# Altium PCB 51第二形态.pcbdoc
Units mil, origin at the board's own origin, x right, y up, seen from the top; angles counter-clockwise.
Board outline 3425 x 4345 mil, 2 copper layers (Top Layer, Bottom Layer); 39 components, 53 nets, 162 pads, 38 vias.
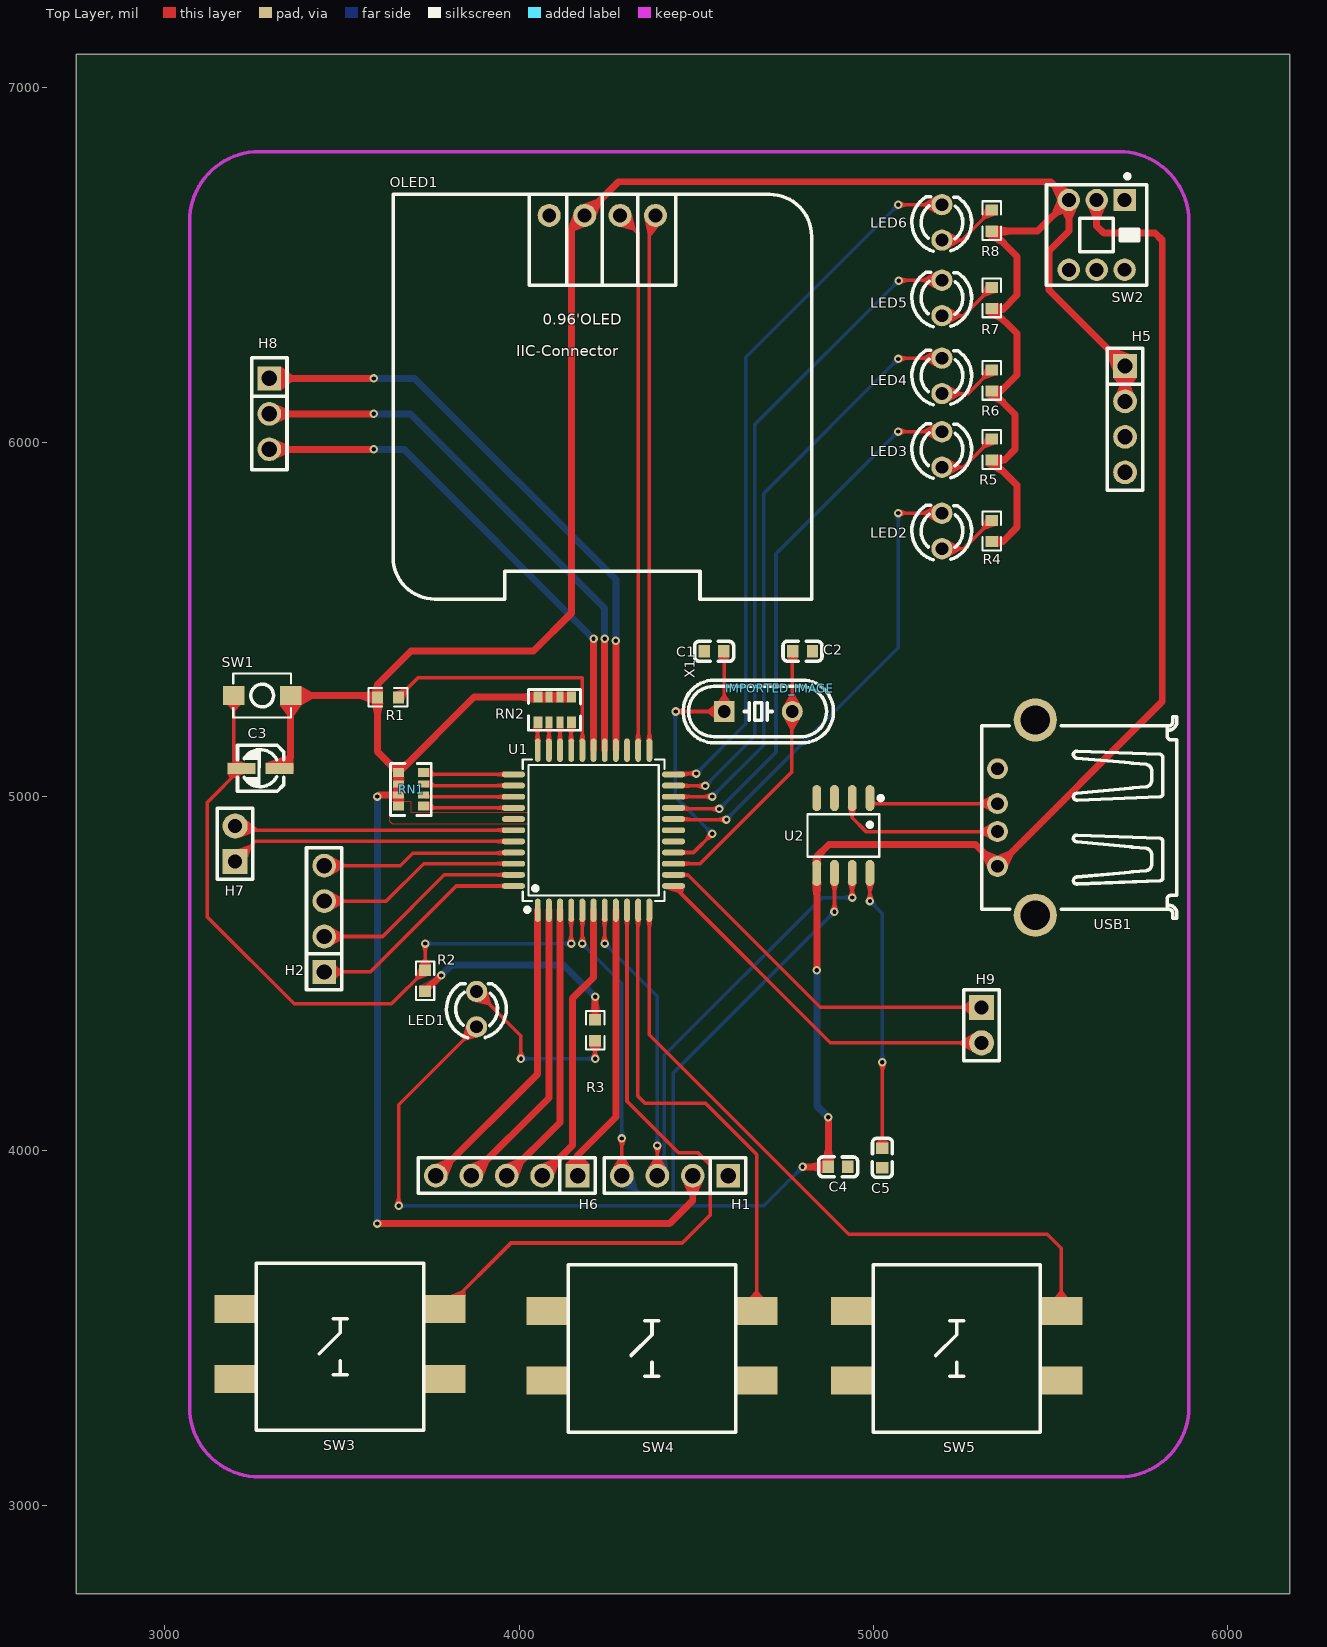
[diagram p0: Top Layer view]
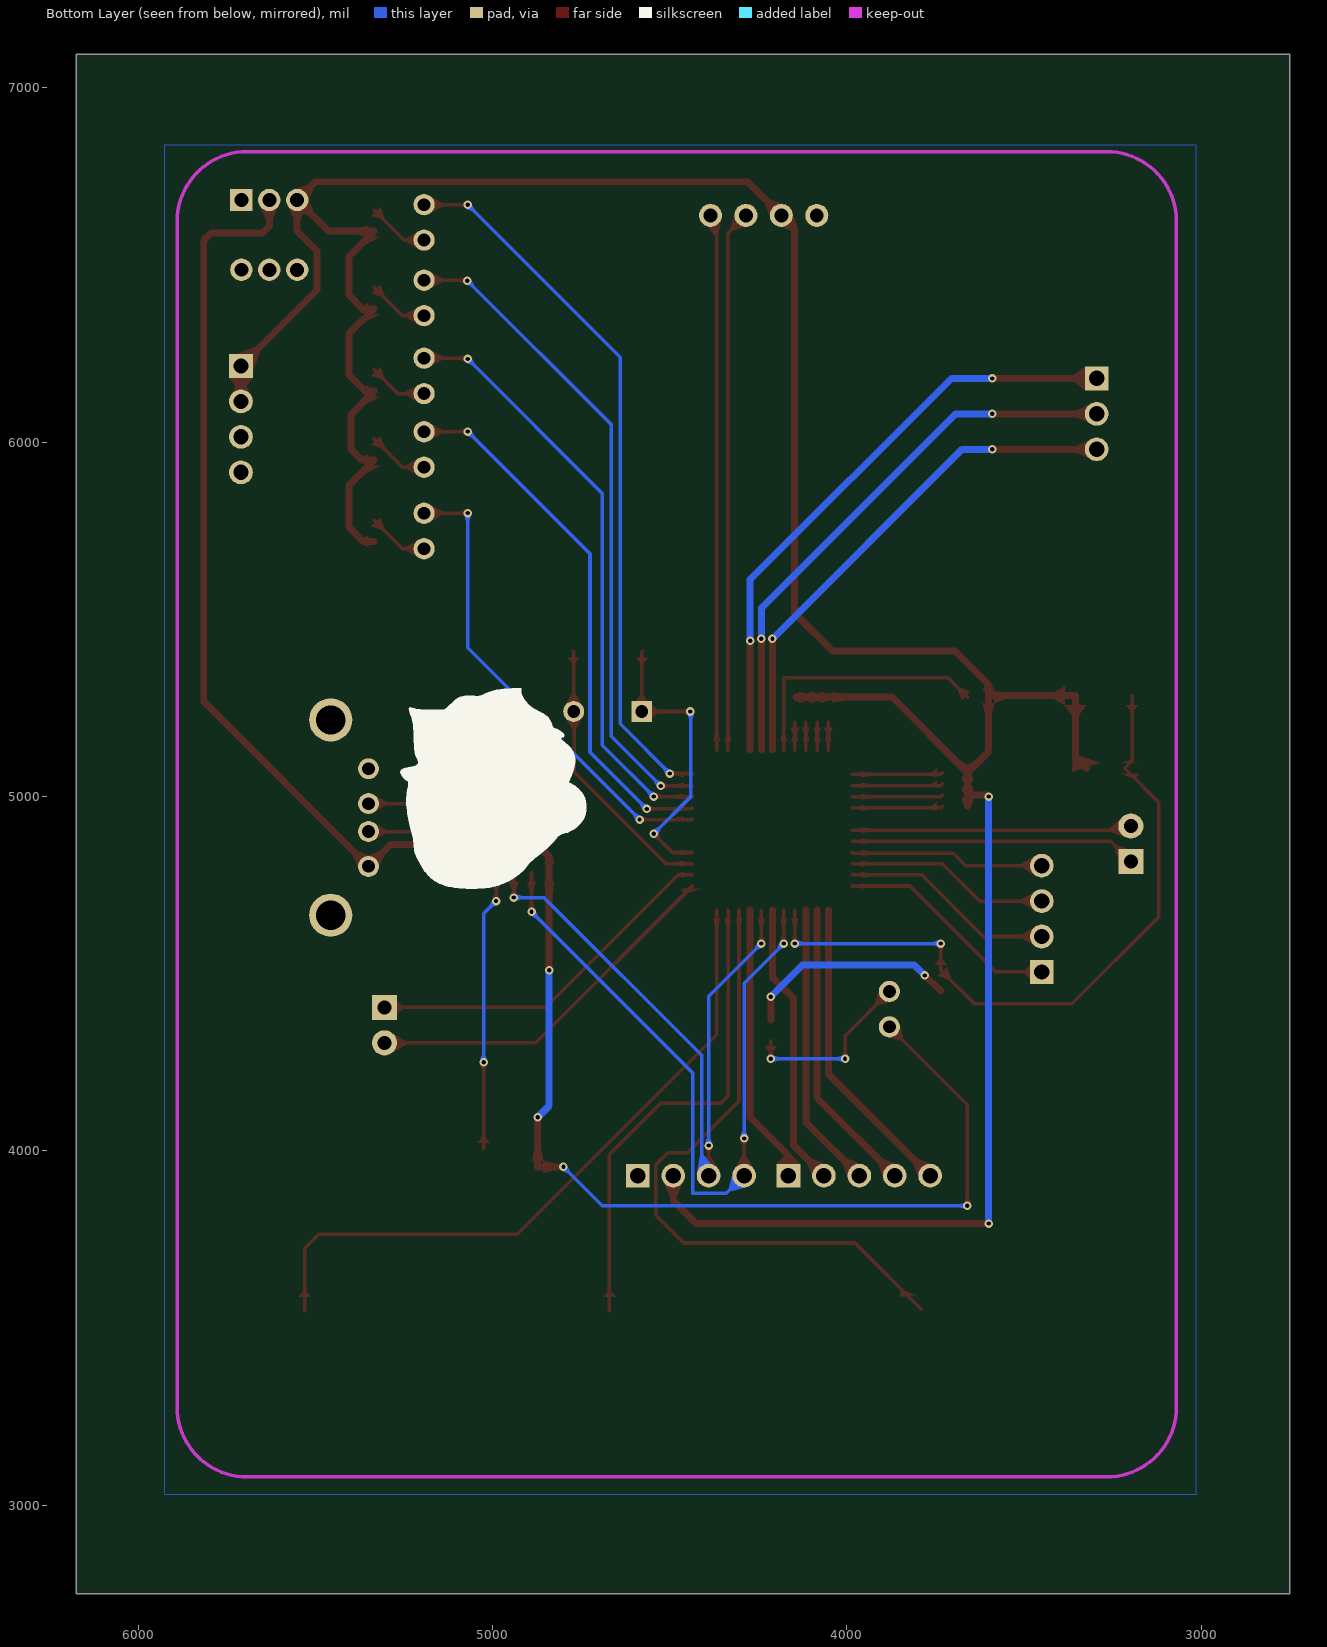
[diagram p1: Bottom Layer view, seen from below]

## Layer stack, top to bottom
Top Layer: signal copper (thickness not stored)
Dielectric: dielectric 12.6, FR-4, Dk 4.8
Bottom Layer: signal copper (thickness not stored)

## Board outline
6175,2750 2750,2750 2750,7095 6175,7095

## Components (designator, comment, footprint, x,y, rotation, side; value= is the part's Value field where it differs from the comment)
C1 "CC0603KRX7R9BB104" C0603 4550,5410 r180 top
C2 "CC0603KRX7R9BB104" C0603 4800,5410 r0 top
C3 "C_Ele_SMD_3x5.4mm" C_Ele_SMD_3x5.4mm 3270,5080 r0 top
C4 "CAP_0603" C0603 4900,3955 r180 top
C5 "CAP_0603" C0603 5025,3980 r270 top
H1 "HDR-M_2.54_1x4P" HDR-TH_4P-P2.54-V-M 4440,3930 r180 top
H2 "HDR-M_2.54_1x4P" HDR-TH_4P-P2.54-V-M 3450,4655 r90 top
H5 "HDR-M_2.54_1x4P" HDR-TH_4P-P2.54-V-M 5710,6065 r270 top
H6 "HDR-M_2.54_1x5P" HDR-TH_5P-P2.54-V-M 3965,3930 r180 top
H7 "HDR-M_2.54_1x2P" HDR-TH_2P-P2.54-V-M-1 3198.67,4866.62 r90 top
H8 "HDR-M_2.54_1x3P" HDR-TH_3P-P2.54-V-M 3295,6080 r270 top
H9 "HDR-M_2.54_1x2P" HDR-TH_2P-P2.54-V-M-1 5305,4355 r270 top
IMPORTED_IMAGE "IMPORTED_IMAGE" IMPORTED_IMAGE 4735,5305 r0 top
LED1 "LED_TH-R_3mm" LED_TH-3mm 3880,4400 r90 top
LED2 "LED_TH-R_3mm" LED_TH-3mm 5193.27,5749.38 r90 top
LED3 "LED_TH-R_3mm" LED_TH-3mm 5193.27,5979.38 r90 top
LED4 "LED_TH-R_3mm" LED_TH-3mm 5193.27,6187.14 r90 top
LED5 "LED_TH-R_3mm" LED_TH-3mm 5193.27,6407.07 r90 top
LED6 "LED_TH-R_3mm" LED_TH-3mm 5193.27,6620.3 r90 top
OLED1 "0.96OLED模块_4P" 0.96OLED_4P 4235,6640 r0 top
R1 "Res_0603" R0603 3630,5280 r0 top
R2 "Res_0603" R0603 3734.66,4480.34 r90 top
R3 "Res_0603" R0603 4214.66,4340.34 r90 top
R4 "Res_0603" R0603 5333.85,5749.38 r90 top
R5 "Res_0603" R0603 5333.85,5979.38 r90 top
R6 "Res_0603" R0603 5333.85,6174.38 r90 top
R7 "Res_0603" R0603 5333.85,6407.07 r90 top
R8 "Res_0603" R0603 5333.85,6625.3 r90 top
RN1 "4D03WGJ0103T5E" RES-ARRAY-SMD_0603-8P-L3.2-W1.6-BL 3695,5020 r90 top
RN2 "4D03WGJ0103T5E" RES-ARRAY-SMD_0603-8P-L3.2-W1.6-BL 4100,5245 r180 top
SW1 "Key_SMD_3x4x2" Key_SMD_3x4x2 3275,5285 r0 top
SW2 "SP-2212" SW-TH_6P-L7.2-W7.2-P2.00-LS5.0 5630,6585 r180 top
SW3 "Key_SMD_12x12x7.3" Key_SMD_12x12x7.3 3495,3455 r180 top
SW4 "Key_SMD_12x12x7.3" Key_SMD_12x12x7.3 4375,3450 r180 top
SW5 "Key_SMD_12x12x7.3" Key_SMD_12x12x7.3 5235,3450 r180 top
U1 "STC89C52RC-40I-LQFP44" LQFP-44_L10.0-W10.0-P0.80-LS12.0-BL 4210,4905 r0 top
U2 "CH340N" SOP-8_L4.9-W3.9-P1.27-LS6.0-BL 4915,4890 r180 top
USB1 "USB_ Type-A" "USB_ Type-A" 5565,4940 r90 top
X1 "X49SD12MSD2SC" HC-49US_L11.5-W4.5-P4.88 4675,5240 r0 top

## Footprints (in the part's own frame and the unit in brackets; to place one, negate y for a bottom-side part, rotate by r counter-clockwise, add the part's x,y. Pads: shape width x height; smd on the part's side, far side on the other; paste and mask are expansions set on the pad)
0.96OLED_4P [mm]
  round 1.65 hole 1 copper offset 0,0 mask+0.051: 1(-3.81,-0.002) 2(-1.27,0.001) 3(1.27,0.001) 4(3.81,0.001)
  silkscreen extent -15,-27.5 15,1.5
C0603 [mm]
  rect 0.8x0.9 smd mask+0.051: 1(-0.7,0) 2(0.7,0)
  silkscreen extent -1.41,-0.71 1.39,0.72
C_Ele_SMD_3x5.4mm [mil]
  rect 78.7x31.5 smd paste+0 mask+2: 1(54.1,-0.55) 2(-53.7,-0.55)
  silkscreen extent -65,-65 65,65
HC-49US_L11.5-W4.5-P4.88 [mm]
  rect 1.5x1.5 hole 0.9 mask+0.051: 1(-2.44,0)
  round 1.5 hole 0.9 mask+0.051: 2(2.44,0)
  silkscreen extent -5.39,-2.25 5.39,2.25
HDR-TH_2P-P2.54-V-M-1 [mm]
  rect 1.8x1.8 hole 1 mask+0.051: 1(-1.27,0)
  round 1.8 hole 1 mask+0.051: 2(1.27,0)
  silkscreen extent -2.54,-1.27 2.54,1.27
HDR-TH_3P-P2.54-V-M [mm]
  rect 1.7x1.7 hole 1.1 mask+0.051: 1(-2.54,0)
  round 1.7 hole 1.1 mask+0.051: 2(0,0) 3(2.54,0)
  silkscreen extent -4.02,-1.27 4.02,1.27
HDR-TH_4P-P2.54-V-M [mm]
  rect 1.7x1.7 hole 1.1 mask+0.051: 1(-3.81,0)
  round 1.7 hole 1.1 mask+0.051: 2(-1.27,0) 3(1.27,0) 4(3.81,0)
  silkscreen extent -5.08,-1.27 5.08,1.27
HDR-TH_5P-P2.54-V-M [mm]
  rect 1.7x1.7 hole 1.1 mask+0.051: 1(-5.08,0)
  round 1.7 hole 1.1 mask+0.051: 2(-2.54,0) 3(0,0) 4(2.54,0) 5(5.08,0)
  silkscreen extent -6.35,-1.27 6.35,1.27
IMPORTED_IMAGE [mil]
Key_SMD_3x4x2 [mm]
  rect 1.53x1.36 smd paste+0 mask+0.051: 1(-2.035,0) 2(2.035,0)
  silkscreen extent -2.08,-1.58 2.08,1.58
Key_SMD_12x12x7.3 [mil]
  rect 118.1x78.7 smd paste+0 mask+2: 1(-295.3,-98.4) 2(295.3,-98.4) 3(295.3,98.4) 4(-295.3,98.4)
  silkscreen extent -236,-228 236,244
LED_TH-3mm [mil]
  round 60 hole 36 paste+0 mask+2: 1(-50,0) 2(50,0)
  silkscreen extent -81,-84 72,85
LQFP-44_L10.0-W10.0-P0.80-LS12.0-BL [mm]
  oval 0.42x1.67 smd mask+0.051: 1(-4,-5.735) 2(-3.2,-5.735) 3(-2.4,-5.735) 4(-1.6,-5.735) 5(-0.8,-5.735) 6(0,-5.735) 7(0.8,-5.735) 8(1.6,-5.735) 9(2.4,-5.735) 10(3.2,-5.735) 11(4,-5.735) 23(4,5.735) 24(3.2,5.735) 25(2.4,5.735) 26(1.6,5.735) 27(0.8,5.735) 28(0,5.735) 29(-0.8,5.735) 30(-1.6,5.735) 31(-2.4,5.735) 32(-3.2,5.735) 33(-4,5.735)
  oval 1.67x0.42 smd mask+0.051: 12(5.735,-4) 13(5.735,-3.2) 14(5.735,-2.4) 15(5.735,-1.6) 16(5.735,-0.8) 17(5.735,0) 18(5.735,0.8) 19(5.735,1.6) 20(5.735,2.4) 21(5.735,3.2) 22(5.735,4) 34(-5.735,4) 35(-5.735,3.2) 36(-5.735,2.4) 37(-5.735,1.6) 38(-5.735,0.8) 39(-5.735,0) 40(-5.735,-0.8) 41(-5.735,-1.6) 42(-5.735,-2.4) 43(-5.735,-3.2) 44(-5.735,-4)
  silkscreen extent -5.08,-5.85 5.08,5.08
R0603 [mil]
  rect 31.75x34.02 smd paste-3937.01 mask+2: 1(-29.66,0) 2(29.66,0)
  silkscreen extent -55,-26 55,26
RES-ARRAY-SMD_0603-8P-L3.2-W1.6-BL [mm]
  rect 0.65x0.8 smd mask+0.051: 1(-1.2,-0.9) 4(1.2,-0.9) 5(1.2,0.9) 8(-1.2,0.9)
  rect 0.5x0.8 smd mask+0.051: 2(-0.4,-0.9) 3(0.4,-0.9) 6(0.4,0.9) 7(-0.4,0.9)
  silkscreen extent -1.87,-1.45 1.87,1.47
SOP-8_L4.9-W3.9-P1.27-LS6.0-BL [mm]
  oval 0.63x1.865 smd mask+0.051: 1(-1.905,-2.682) 2(-0.635,-2.682) 3(0.635,-2.682) 4(1.905,-2.682) 5(1.905,2.682) 6(0.635,2.682) 7(-0.635,2.682) 8(-1.905,2.682)
  silkscreen extent -2.82,-2.83 2.58,1.52
SW-TH_6P-L7.2-W7.2-P2.00-LS5.0 [mm]
  rect 1.6x1.6 hole 1 mask+0.051: 1(-2,-2.5)
  round 1.6 hole 1 mask+0.051: 2(0,-2.5) 3(2,-2.5) 4(-2,2.5) 5(0,2.5) 6(2,2.5)
  silkscreen extent -3.6,-4.35 3.6,3.6
"USB_ Type-A" [mm]
  round 1.5 hole 0.9 copper offset 0,0 paste+0 mask+0.051: 1(-3.484,5.461) 4(3.516,5.461)
  round 1.5 hole 0.9 paste+0 mask+0.051: 2(-0.984,5.461) 3(1.016,5.461)
  round 3.1 hole 2.1 paste+0 mask+0.051: SH1(7.016,2.751) SH2(-6.984,2.751)
  silkscreen extent -7.2,-7.4 7.24,6.6

## Via types
v1: diameter 24.02, hole 12.01, Top Layer to Bottom Layer, 38 vias

## Nets (pads, with @x,y where several pads share a name; then routed paths per layer and width w, separated by ;. In a path a pad name is that pad's centre, name@x,y a point inside that pad or via, vN(x,y) a via of type N, cw(c..) or ccw(c..) an arc to the next point about the centre after c; other vN are vias at no path point)
$1N991: RN1.1 U1.37 | length 255.9
  Top Layer w10: RN1.1 3735.43,4967.76 3983.98,4967.76 U1.37
$1N994: RN1.2 U1.36 | length 255.9
  Top Layer w10: RN1.2 3735.43,4999.25 3983.97,4999.25 U1.36
$1N997: RN1.3 U1.35 | length 255.8
  Top Layer w10: RN1.3 3735.2,5030.98 U1.35
$1N1000: RN1.4 U1.34 | length 255.7
  Top Layer w10: RN1.4 3735.2,5062.48 U1.34
$1N1206: RN2.5 U1.33 | length 78.9
  Top Layer w10: U1.33 4052.52,5209.32 RN2.5
$1N1210: RN2.6 U1.32 | length 78.9
  Top Layer w10: U1.32 4084.02,5209.34 RN2.6
$1N1214: RN2.7 U1.31 | length 78.9
  Top Layer w10: U1.31 4115.75,5131.03 RN2.7
$1N1218: RN2.8 U1.30 | length 78.9
  Top Layer w10: U1.30 4147.01,5209.34 RN2.8
$1N1330: R1.2 U1.29 | length 745.8
  Top Layer w10: R1.2 3714.66,5335 4178.5,5335 U1.29
$1N5648: LED1.2 R3.1 | length 502.1
  Top Layer w10: LED1.2 4005,4325 v1(4005,4260) ; v1(4214.66,4260) R3.1
  Bottom Layer w10: v1(4005,4260) v1(4214.66,4260)
$1N5816: LED2.1 R4.2 | length 173.6
  Top Layer w10: LED2.1 5254.19,5699.38 R4.2
$1N5819: LED3.1 R5.2 | length 173.6
  Top Layer w10: LED3.1 5254.19,5929.38 R5.2
$1N5822: LED4.1 R6.2 | length 168.3
  Top Layer w10: LED4.1 5266.95,6137.14 R6.2
$1N5825: LED5.1 R7.2 | length 173.6
  Top Layer w10: LED5.1 5254.19,6357.07 R7.2
$1N5828: LED6.1 R8.2 | length 175.6
  Top Layer w10: LED6.1 5249.19,6570.3 R8.2
$1N6548: C5.1 U2.8 | length 791.3
  Top Layer w10: v1(4990,4705) U2.8 ; C5.1 v1(5025,4250)
  Bottom Layer w10: v1(4990,4705) 5025,4670 v1(5025,4250)
ALE: H8.2 U1.27 | length 1574.6
  Top Layer w19.68: U1.27 v1(4241.5,5445)
  Top Layer w19.7: H8.2 v1(3590,6080)
  Bottom Layer w19.68: v1(3590,6080) 3693.35,6080 4241.5,5531.85 v1(4241.5,5445)
D+: U2.1 USB1.3 | length 366.5
  Top Layer w10: U2.1 5005.61,4980 USB1.3
D-: U2.2 USB1.2 | length 481.7
  Top Layer w10: U2.2 4940,4940 4978.74,4901.26 USB1.2
GND: C1.2 C2.2 C4.1 C5.2 H1.1 H5.3 H5.4 OLED1.1 R2.1 R3.2 SW3.3 SW4.3 SW5.3 U1.16 U2.3 USB1.4 | length 613.3
  Top Layer w19.7: R2.1 3778.98,4495 v1(3780,4495) ; R3.2 v1(4214.66,4435)
  Bottom Layer w19.7: v1(3780,4495) 3810,4525 4125,4525 4214.66,4435.34 v1(4214.66,4435)
P1.1: H2.4 U1.41 | length 550.7
  Top Layer w10: H2.4 3665,4805 3700,4840 3984.21,4840 U1.41
P1.2: H2.3 U1.42 | length 577.9
  Top Layer w10: H2.3 3625,4705 3730.51,4810.51 U1.42
P1.3: H2.2 U1.43 | length 606.3
  Top Layer w10: H2.2 3615,4605 3789.02,4779.02 U1.43
P1.4: H2.1 U1.44 | length 634.7
  Top Layer w10: H2.1 3580,4505 3822.52,4747.52 U1.44
P1.5: H6.5 U1.1 | length 868.3
  Top Layer w19.7: H6.5 4052.52,4217.52 U1.1
P1.6: H6.4 U1.2 | length 839.9
  Top Layer w19.7: H6.4 4084.02,4149.02 U1.2
P1.7: H6.3 U1.3 | length 811.6
  Top Layer w19.7: H6.3 4115.51,4080.51 U1.3
P2.0: LED2.2 U1.18 | length 1339.3
  Top Layer w10: U1.18 4437.29,4935 v1(4585,4935) ; v1(5070,5800) 5192.65,5800 LED2.2
  Bottom Layer w10: v1(4585,4935) 5070,5420 v1(5070,5800)
P2.1: LED3.2 U1.19 | length 1528.2
  Top Layer w10: U1.19 4438.78,4965 v1(4565,4965) ; v1(5070,6030) 5192.65,6030 LED3.2
  Bottom Layer w10: v1(4565,4965) 4725,5125 4725,5685 v1(5070,6030)
P2.2: LED4.2 U1.20 | length 1686
  Top Layer w10: U1.20 4436.3,5000 v1(4545,5000) ; v1(5070,6235) 5072.14,6237.14 LED4.2
  Bottom Layer w10: v1(4545,5000) 4690,5145 4690,5855 v1(5070,6235)
P2.3: LED5.2 U1.21 | length 1864.5
  Top Layer w10: U1.21 4436.77,5030 v1(4525,5030) ; v1(5071.34,6455.89) 5072.53,6457.07 LED5.2
  Bottom Layer w10: v1(4525,5030) 4665,5170 4665,6050 5070.89,6455.89 v1(5071.34,6455.89)
P2.4: LED6.2 U1.22 | length 2029.8
  Top Layer w10: U1.22 4438.31,5065 v1(4500,5065) ; v1(5070,6670) 5192.97,6670 LED6.2
  Bottom Layer w10: v1(4500,5065) 4640,5205 4640,6240 v1(5070,6670)
P3.1: H6.2 U1.6 | length 809.3
  Top Layer w19.7: H6.2 4150,4015 4150,4429.48 4210,4489.48 U1.6
P3.2: H6.1 U1.8 | length 793.9
  Top Layer w19.7: H6.1 4165,3987.43 4272.99,4095.42 U1.8
P3.3: SW3.1 U1.9 | length 1849.8
  Top Layer w10: SW3.1 3976.9,3740 4460,3740 4540,3820 4540,3960 4505,3995 4450,3995 4304.49,4140.51 4304.49,4584.74 ; U1.9 4304.49,4584.74 ; 4305,4584.23 4304.49,4584.74
P3.4: SW4.1 U1.10 | length 1369.7
  Top Layer w10: U1.10 4335,4678.23 4335,4155 4355,4135 4525,4135 4670.3,3989.7 SW4.1
P3.5: SW5.1 U1.11 | length 1940.3
  Top Layer w10: U1.11 4367.48,4327.82 4930.3,3765 5490,3765 5530,3725 5530,3548.7 SW5.1
P4.1: H8.3 U1.28 | length 1450.8
  Top Layer w19.68: U1.28 v1(4210,5445)
  Top Layer w19.7: H8.3 v1(3590,5980)
  Bottom Layer w19.68: v1(3590,5980) 3675,5980 v1(4210,5445)
P4.2: H7.2 U1.39 | length 790.3
  Top Layer w10: H7.2 3210.29,4905 U1.39
PSEN: H8.1 U1.26 | length 1694.5
  Top Layer w19.68: U1.26 v1(4272.99,5440)
  Top Layer w19.7: H8.1 v1(3590,6180)
  Bottom Layer w19.68: v1(3590,6180) 3705,6180 4272.99,5612.01 v1(4272.99,5440)
RD: H9.1 U1.13 | length 1024.1
  Top Layer w10: U1.13 4475.67,4779.02 4849.69,4405 H9.1
RST: C3.2 R2.2 SW1.1 U1.4 | length 2010.6
  Top Layer w10: SW1.1 3194.88,5100.87 C3.2 3120,4983.15 3120,4660 3365,4415 3639.66,4415 R2.2 3735,4510.34 v1(3735,4585) ; v1(4147.01,4585) U1.4
  Bottom Layer w10: v1(3735,4585) v1(4147.01,4585)
RXD: H1.4 U1.5 U2.6 | length 2054
  Top Layer w10: v1(4178.5,4585) U1.5 ; H1.4 v1(4290,4035) ; v1(4890,4675) U2.6
  Bottom Layer w10: v1(4178.5,4585) 4290,4473.5 v1(4290,4035) ; H1.4 4340,3880 4435,3880 4435,4220 v1(4890,4675)
SCL: OLED1.3 U1.24 | length 1530.4
  Top Layer w10: OLED1.3 4335.98,6589.07 U1.24
SDA: OLED1.4 U1.23 | length 1516.5
  Top Layer w10: U1.23 4367.48,6622.53 OLED1.4
T2: H7.1 U1.40 | length 809.1
  Top Layer w10: H7.1 3255.56,4873.5 U1.40
TXD: H1.3 U1.7 U2.7 | length 1942.7
  Top Layer w10: v1(4241.5,4585) U1.7 ; H1.3 v1(4390,4015) ; v1(4940,4715) U2.7
  Bottom Layer w10: v1(4241.5,4585) 4390,4436.5 v1(4390,4015) ; H1.3 4410,3950 4410,4270 4855,4715 v1(4940,4715)
USB_VCC: C4.2 LED1.1 SW2.2 U2.5 USB1.1 | length 5527.6
  Top Layer w10: v1(3660,3845) 3660,4130 LED1.1
  Top Layer w19.7: v1(4800,3955) C4.2 v1(4872.44,4095) ; v1(4840,4510) U2.5 4840,4830 4875,4865 5287.83,4865 USB1.1 5815,5267.83 5815,6570 5795,6590 5650,6590 5630,6610 SW2.2
  Bottom Layer w10: v1(3660,3845) 4690,3845 v1(4800,3955)
  Bottom Layer w19.7: v1(4840,4510) 4840,4127.44 v1(4872.44,4095)
VCC: C3.1 H1.2 H5.1 H5.2 OLED1.2 R1.1 R4.1 R5.1 R6.1 R7.1 R8.1 RN1.5 RN1.6 RN1.7 RN1.8 RN2.1 RN2.2 RN2.3 RN2.4 SW1.2 SW2.3 U1.38 | length 8969.5
  Top Layer w19.68: C3.1 3355.12,5110.47 SW1.2 3595.34,5285 R1.1 3600.34,5315.77 3695,5410.44 4040.43,5410.44 4147.24,5517.24 4147.24,6602.29 OLED1.2 ; v1(3600,3795) 4425,3795 4490,3860 H1.2
  Top Layer w19.7: v1(3600,5000) 3604.25,5004.25 RN1.7 ; R1.1 3600.34,5126.47 RN1.5 ; RN1.8 RN1.7 ; RN2.1@4143.97,5280.44 RN2.2 RN2.3 RN2.4 3872.76,5280.44 RN1.5 ; OLED1.2 4279.95,6735 5499.69,6735 SW2.3 ; R4.1 5334.13,5720 5365,5720 5405,5760 5405,5878.57 R5.1 5369.72,5949.72 5400,5980 5400,6078.57 R6.1 5334.13,6145 5360,6145 5405,6190 5405,6306.26 R7.1@5336.26,6375 ; R7.1 R7.1@5336.26,6375 ; H5.2 H5.1 5495,6430 5495,6540 5551.26,6596.26 SW2.3 ; RN1.7 RN1.6 RN1.5 ; R7.1@5336.26,6375 5365,6375 5405,6415 5405,6524.49 R8.1 5463.48,6595.64 SW2.3
  Bottom Layer w19.68: v1(3600,3795) v1(3600,5000)
WR: H9.2 U1.12 | length 1052.5
  Top Layer w10: U1.12 4878.31,4305 H9.2
XTAL1: C1.1 U1.15 X1.1 | length 827.7
  Top Layer w10: U1.15 4492.01,4842.01 v1(4545,4895) ; v1(4442.37,5239.98) X1.1 ; C1.1 4578.94,5408.62 X1.1
  Bottom Layer w10: v1(4442.37,5239.98) 4440,5237.62 4440,5000 v1(4545,4895)
XTAL2: C2.1 U1.14 X1.2 | length 782.7
  Top Layer w10: U1.14 4510.51,4810.51 4770,5070 4770,5238.94 X1.2 4771.06,5408.62 C2.1
"": SW2.1 SW2.4 SW2.5 SW2.6 SW3.2 SW3.4 SW4.2 SW4.4 SW5.2 SW5.4 U1.17 U1.25 U2.4 USB1.SH1 USB1.SH2

## Polygon pours and split planes (outlines as drawn)
GND on Bottom Layer (solid, remove dead copper, pour order 1): 3015,3030 5925,3030 5925,6840 3015,6840
GND on Top Layer (solid, remove dead copper, pour order 2): 3000,3000 5920,3000 5920,6845 3000,6845
VCC on Top Layer (solid, remove dead copper, pour order 0): 3694.61,4986.08 3694.61,4954.97 4026.09,4954.97 4026.09,4921.32 3643.68,4921.32 3635,4930 3635,4986.08

## Keep-outs
Board Outline Layer:
  lines w10 net "": 3070,3276.85 ccw(c3266.85,3276.85) 3266.85,3080 5693.15,3080 ccw(c5693.15,3276.85) 5890,3276.85 5890,6623.15 ccw(c5693.15,6623.15) 5693.15,6820 3266.85,6820 ccw(c3266.85,6623.15) 3070,6623.15 3070,3276.85

## Other copper
Top Layer:
  region net RST: 4152.01,4633.02 4155.28,4654.6 4138.74,4654.6 4142.01,4633.02
  region net RXD: 4183.5,4633.02 4186.77,4654.6 4170.23,4654.6 4173.5,4633.02
  region net TXD: 4246.5,4633.02 4249.77,4654.6 4233.23,4654.6 4236.5,4633.02
  region net P3.3: 4309.49,4633.02 4312.76,4654.6 4296.22,4654.6 4299.49,4633.02
  region net P3.4: 4340,4632.38 4344.25,4654.6 4327.71,4654.6 4330,4633.89
  region net P3.5: 4362.48,4633.02 4372.48,4633.02 4375.75,4654.6 4359.21,4654.6
  region net WR: 4461.74,4728.65 4466.31,4741.75 4411.18,4739.25 4447.59,4728.65
  region net RD: 4475.67,4784.02 4460.4,4787.29 4460.4,4770.75 4475.67,4774.02
  region net XTAL2: 4481.98,4815.51 4460.4,4818.78 4460.4,4802.24 4481.98,4805.51
  region net XTAL1: 4481.98,4847.01 4460.4,4850.28 4460.4,4833.74 4481.98,4837.01
  region net P2.0: 4480.51,4930 4482.89,4940 4460.4,4944.77 4460.4,4928.23
  region net P2.1: 4477.52,4960 4483.42,4970 4460.4,4976.26 4460.4,4959.72
  region net P2.2: 4482.34,4995 4481.56,5005 4460.4,5007.76 4460.4,4991.22
  region net P2.3: 4481.11,5025 4482.62,5035 4460.4,5039.25 4460.4,5022.71
  region net P2.4: 4483.28,5060 4478.83,5070 4460.4,5070.75 4460.4,5054.21
  region net SDA: 4362.48,5176.98 4359.21,5155.4 4375.75,5155.4 4372.48,5176.98
  region net SCL: 4330.98,5176.98 4327.71,5155.4 4344.25,5155.4 4340.98,5176.98
  region net $1N1330: 4173.5,5176.98 4170.23,5155.4 4186.77,5155.4 4183.5,5176.98
  region net $1N1218: 4142.01,5176.98 4138.74,5155.4 4155.28,5155.4 4152.01,5176.98
  region net $1N1214: 4110.75,5177.16 4107.24,5155.4 4123.78,5155.4 4120.75,5176.79
  region net $1N1210: 4079.02,5176.98 4075.75,5155.4 4092.29,5155.4 4089.02,5176.98
  region net $1N1206: 4047.52,5176.98 4044.25,5155.4 4060.79,5155.4 4057.52,5176.98
  region net $1N1000: 3938.02,5057.48 3959.6,5054.21 3959.6,5070.75 3938.02,5067.48
  region net $1N997: 3938.02,5025.98 3959.6,5022.71 3959.6,5039.25 3938.02,5035.98
  region net $1N994: 3937.84,5004.25 3938.21,4994.25 3959.6,4991.22 3959.6,5007.76
  region net $1N991: 3937.85,4972.76 3938.2,4962.76 3959.6,4959.72 3959.6,4976.26
  region net P4.2: 3938.02,4900 3959.6,4896.73 3959.6,4913.27 3938.02,4910
  region net T2: 3938.02,4868.5 3959.6,4865.23 3959.6,4881.77 3938.02,4878.5
  region net P1.1: 3936.9,4845 3940.22,4835 3959.6,4833.74 3959.6,4850.28
  region net P1.2: 3938.02,4805.51 3959.6,4802.24 3959.6,4818.78 3938.02,4815.51
  region net P1.3: 3938.02,4774.02 3959.6,4770.75 3959.6,4787.29 3938.02,4784.02
  region net P1.4: 3938.02,4752.52 3938.02,4742.52 3959.6,4739.25 3959.6,4755.79
  region net VCC: 3649.72,5035.75 3669.41,5035.75 3675.31,5054.44 3643.82,5054.44
  region net VCC: 3639.8,5100.93 3622.92,5089.95 3643.82,5080.04 3675.31,5080.04
  region net VCC: 3679.33,5100.93 3643.82,5080.04 3675.31,5080.04 3696.21,5089.95
  region net $1N1000: 3761.18,5057.48 3761.18,5067.48 3746.18,5079.98 3746.18,5054.44
  region net VCC: 3649.72,5004.25 3669.41,5004.25 3675.31,5025.91 3643.82,5025.91
  region net VCC: 3649.72,5067.24 3643.82,5045.59 3675.31,5045.59 3669.41,5067.24
  region net $1N997: 3761.18,5025.98 3761.18,5035.98 3746.18,5045.59 3746.18,5025.91
  region net VCC: 3649.72,5035.75 3643.82,5014.09 3675.31,5014.09 3669.41,5035.75
  region net VCC: 3669.41,4972.76 3675.31,4994.41 3643.82,4994.41 3649.72,4972.76
  region net VCC: 3669.41,5004.25 3649.72,5004.25 3643.82,4985.56 3675.31,4985.56
  region net $1N991: 3761.18,4972.76 3746.18,4985.26 3746.18,4959.96 3761.18,4962.76
  region net $1N1206: 4047.52,5178.82 4057.52,5178.82 4065.56,5193.82 4039.96,5193.82
  region net VCC: 4010.41,5290.28 4010.41,5270.59 4039.96,5264.69 4039.96,5296.18
  region net VCC: 4084.25,5290.28 4065.56,5296.18 4065.56,5264.69 4084.25,5270.59
  region net $1N1210: 4079.02,5178.82 4089.02,5178.82 4094.09,5193.82 4074.41,5193.82
  region net VCC: 4052.76,5290.28 4052.76,5270.59 4074.41,5264.69 4074.41,5296.18
  region net VCC: 4115.75,5290.28 4094.09,5296.18 4094.09,5264.69 4115.75,5270.59
  region net $1N1214: 4110.75,5178.82 4120.75,5178.82 4125.59,5193.82 4105.91,5193.82
  region net VCC: 4143.97,5290.28 4125.59,5296.18 4125.59,5264.69 4143.97,5270.59
  region net VCC: 4084.25,5290.28 4084.25,5270.59 4105.91,5264.69 4105.91,5296.18
  region net $1N1218: 4142.01,5178.82 4152.01,5178.82 4160.04,5193.82 4134.44,5193.82
  region net VCC: 4115.75,5290.28 4115.75,5270.59 4134.44,5264.69 4134.44,5296.18
  region net $1N1330: 3686.14,5299.41 3680.2,5307.61 3651.92,5297.01 3675.54,5271.13
  region net VCC: 3610.19,5233.44 3616.22,5262.99 3584.46,5262.99 3590.49,5233.44
  region net VCC: 3554.94,5294.84 3554.94,5275.16 3584.46,5262.99 3584.46,5297.01
  region net VCC: 3610.18,5315.77 3590.5,5315.77 3584.46,5297.01 3616.22,5297.01
  region net XTAL1: 4534.41,5244.98 4534.41,5234.98 4549.41,5222.48 4549.41,5257.48
  region net XTAL1: 4573.94,5284.53 4561.44,5269.53 4596.44,5269.53 4583.94,5284.53
  region net XTAL2: 4748.23,5221.28 4765,5189.99 4775,5189.63 4792.49,5219.69
  region net XTAL2: 4793.21,5259.53 4776.06,5290.2 4766.06,5290.2 4748.91,5259.53
  region net XTAL1: 4573.94,5377.28 4583.94,5377.28 4593.31,5392.28 4561.81,5392.28
  region net XTAL2: 4766.06,5377.28 4776.06,5377.28 4788.19,5392.28 4756.69,5392.28
  region net RST: 3199.88,5243.23 3212.38,5258.23 3177.38,5258.23 3189.88,5243.23
  region net VCC: 3364.96,5228.7 3385.24,5258.23 3325,5258.23 3345.28,5228.7
  region net VCC: 3414.77,5294.84 3385.24,5311.77 3385.24,5258.23 3414.77,5275.16
  region net VCC: 3362.08,5103.51 3346.81,5116.08 3284.75,5095.2 3363.45,5070.08
  region net RST: 3197.01,5053.09 3225.3,5063.7 3176.95,5064.85 3182.87,5053.09
  region net RST: 3198.42,5104.41 3191.34,5097.33 3176.95,5095.2 3225.3,5095.2
  region net RST: 3707.05,4489.46 3715.25,4483.52 3743.53,4494.12 3717.65,4517.74
  region net RST: 3740,4540.88 3730,4540.88 3717.65,4525.88 3751.67,4525.88
  region net USB_VCC: 5351.85,4832.3 5321.47,4845.29 5307.54,4831.36 5320.53,4800.98
  region net USB_VCC: 5379.47,4800.98 5392.46,4831.36 5378.53,4845.29 5348.15,4832.3
  region net D-: 5330.47,4923.4 5299.8,4906.26 5299.8,4896.26 5330.47,4879.11
  region net D+: 5330.47,5002.15 5299.8,4985 5299.8,4975 5330.47,4957.85
  region net USB_VCC: 5606.38,6662.59 5620.15,6629.88 5639.85,6629.88 5653.62,6662.59
  region net VCC: 5519.83,6685.4 5506.43,6652.53 5520.36,6638.6 5553.23,6651.99
  region net VCC: 5553.23,6714.86 5520.36,6728.25 5506.43,6714.32 5519.83,6681.45
  region net VCC: 5527.64,6662.59 5541.41,6629.88 5561.11,6629.88 5574.88,6662.59
  region net USB_VCC: 3850.06,4351.88 3840.4,4317.47 3847.47,4310.4 3881.88,4320.06
  region net $1N5648: 3878.12,4420.06 3912.53,4410.4 3919.6,4417.47 3909.94,4451.88
  region net $1N5648: 4219.66,4279.8 4231.67,4294.8 4197.65,4294.8 4209.66,4279.8
  region net $1N5816: 5213.12,5676.88 5244.27,5694.38 5244.27,5704.38 5213.12,5721.88
  region net P2.0: 5173.9,5822.28 5142.38,5805 5142.17,5795 5172.97,5777.29
  region net $1N5819: 5213.12,5906.88 5244.27,5924.38 5244.27,5934.38 5213.12,5951.88
  region net P2.1: 5173.9,6052.28 5142.38,6035 5142.17,6025 5172.97,6007.29
  region net $1N5822: 5213.12,6114.64 5244.27,6132.14 5244.27,6142.14 5213.12,6159.64
  region net P2.2: 5173.43,6259.64 5142.27,6242.14 5142.27,6232.14 5173.43,6214.64
  region net $1N5825: 5213.12,6334.57 5244.27,6352.07 5244.27,6362.07 5213.12,6379.57
  region net P2.3: 5173.43,6479.57 5142.27,6462.07 5142.27,6452.07 5173.43,6434.57
  region net $1N5828: 5213.12,6547.8 5244.27,6565.3 5244.27,6575.3 5213.12,6592.8
  region net P2.4: 5173.21,6692.6 5142.22,6675 5142.32,6665 5173.66,6647.6
  region net $1N5816: 5314.44,5752.56 5342.72,5763.16 5316.84,5786.78 5306.24,5758.5
  region net VCC: 5365,5710.15 5365,5729.85 5350.86,5735.59 5350.86,5703.84
  region net $1N5819: 5314.44,5982.56 5342.72,5993.16 5316.84,6016.78 5306.24,5988.5
  region net VCC: 5369.72,5939.87 5369.72,5959.57 5350.86,5965.59 5350.86,5933.84
  region net VCC: 5371.75,5925.75 5350.86,5933.84 5316.84,5933.84 5356.69,5912.95
  region net $1N5822: 5314.44,6177.56 5342.72,6188.16 5316.84,6211.78 5306.24,6183.5
  region net VCC: 5360,6154.85 5350.86,6160.59 5350.86,6128.84 5360,6135.15
  region net VCC: 5371.75,6120.75 5350.86,6128.84 5316.84,6128.84 5356.69,6107.95
  region net $1N5825: 5314.44,6410.25 5342.72,6420.86 5316.84,6444.47 5306.24,6416.19
  region net VCC: 5365,6384.85 5350.86,6393.29 5350.86,6361.54 5365,6365.15
  region net VCC: 5371.75,6353.44 5350.86,6361.54 5316.84,6361.54 5356.69,6340.64
  region net $1N5828: 5314.44,6628.48 5342.72,6639.08 5316.84,6662.7 5306.24,6634.42
  region net VCC: 5371.75,6571.67 5350.86,6579.76 5316.84,6579.76 5356.69,6558.87
  region net VCC: 5380.41,6585.79 5380.41,6605.49 5350.86,6611.52 5350.86,6579.76
  region net D-: 4935,4944.95 4945,4944.95 4952.4,4971.3 4927.6,4971.3
  region net $1N6548: 4985,4733.73 4995,4733.73 5002.4,4760.08 4977.6,4760.08
  region net TXD: 4935,4733.73 4945,4733.73 4952.4,4760.08 4927.6,4760.08
  region net RXD: 4885,4733.73 4895,4733.73 4902.4,4760.08 4877.6,4760.08
  region net USB_VCC: 4830.15,4722.99 4849.85,4722.99 4852.4,4760.08 4827.6,4760.08
  region net USB_VCC: 4849.85,4830 4830.15,4830 4827.6,4808.7 4852.4,4808.7
  region net VCC: 4464.9,3907.87 4480.16,3873.11 4499.84,3873.11 4515.1,3907.87
  region net TXD: 4415.1,3952.13 4395,3986.89 4385,3986.89 4364.9,3952.13
  region net RXD: 4315.1,3952.13 4295,3986.89 4285,3986.89 4264.9,3952.13
  region net USB_VCC: 4827.14,3964.85 4827.14,3945.15 4856.69,3937.28 4856.69,3972.72
  region net USB_VCC: 4862.59,4002.27 4856.69,3972.72 4888.19,3972.72 4882.29,4002.27
  region net $1N6548: 5020,4038.31 5007.5,4023.31 5042.5,4023.31 5030,4038.31
  region net P1.4: 3498.46,4510 3483.46,4522.5 3483.46,4487.5 3498.46,4500
  region net P1.3: 3472.13,4579.9 3506.89,4600 3506.89,4610 3472.13,4630.1
  region net P1.2: 3472.13,4679.9 3506.89,4700 3506.89,4710 3472.13,4730.1
  region net P1.1: 3472.13,4779.9 3506.89,4800 3506.89,4810 3472.13,4830.1
  region net VCC: 5655.64,6255.43 5676.54,6199.71 5725.29,6248.46 5669.57,6269.36
  region net VCC: 5719.85,6151.99 5743.46,6181.54 5676.54,6181.54 5700.15,6151.99
  region net VCC: 5735.1,6137.13 5719.85,6171.89 5700.15,6171.89 5684.9,6137.13
  region net SDA: 4352.9,6635.1 4362.48,6588.9 4372.48,6582.5 4393.92,6608.82
  region net SCL: 4282.97,6607.63 4320.51,6597.47 4327.58,6604.54 4317.42,6642.08
  region net VCC: 4152.58,6642.08 4140.28,6609.25 4154.2,6595.33 4187.03,6607.63
  region net VCC: 4217.42,6638.02 4231.01,6672.13 4217.08,6686.06 4182.97,6672.47
  region net P3.3: 3833.19,3603.36 3804.9,3592.75 3849.35,3587.7 3847.33,3603.36
  region net P3.4: 4665.3,3602.75 4652.8,3587.75 4687.8,3587.75 4675.3,3602.75
  region net P3.5: 5525,3602.75 5512.5,3587.75 5547.5,3587.75 5535,3602.75
  region net P3.2: 4155.15,3987.43 4131.54,3963.46 4198.46,3963.46 4174.85,3987.43
  region net P3.1: 4098.4,3927.9 4112.19,3963.26 4098.26,3977.19 4062.9,3963.4
  region net P1.7: 3998.4,3927.9 4012.19,3963.26 3998.26,3977.19 3962.9,3963.4
  region net P1.6: 3898.4,3927.9 3912.19,3963.26 3898.26,3977.19 3862.9,3963.4
  region net P1.5: 3798.4,3927.9 3812.19,3963.26 3798.26,3977.19 3762.9,3963.4
  region net P4.2: 3212.1,4883.83 3256.67,4900 3260.14,4910 3229.53,4934.04
  region net T2: 3244.71,4855.59 3237.64,4862.66 3209.36,4852.05 3234.11,4827.3
  region net PSEN: 3358.01,6170.15 3358.01,6189.85 3328.46,6213.46 3328.46,6146.54
  region net ALE: 3317.13,6054.9 3351.89,6070.15 3351.89,6089.85 3317.13,6105.1
  region net P4.1: 3317.13,5954.9 3351.89,5970.15 3351.89,5989.85 3317.13,6005.1
  region net WR: 5281.56,4331.57 5244.76,4310 5244.76,4300 5281.56,4278.43
  region net RD: 5254.57,4410 5254.57,4400 5269.57,4387.5 5269.57,4422.5
  region net USB_VCC: 3669.01,3852.94 3665,3865.41 3655,3865.41 3650.99,3852.94
  region net $1N5648: 4223.67,4267.94 4219.66,4280.41 4209.66,4280.41 4205.65,4267.94
  region net $1N5648: 4014.01,4267.94 4010,4280.41 4000,4280.41 3995.99,4267.94
  region net RXD: 4187.51,4592.94 4183.5,4605.41 4173.5,4605.41 4169.49,4592.94
  region net RXD: 4280.99,4027.06 4285,4014.59 4295,4014.59 4299.01,4027.06
  region net TXD: 4250.51,4592.94 4246.5,4605.41 4236.5,4605.41 4232.49,4592.94
  region net TXD: 4380.99,4007.06 4385,3994.59 4395,3994.59 4399.01,4007.06
  region net RST: 4156.02,4592.94 4152.01,4605.41 4142.01,4605.41 4138,4592.94
  region net RST: 3725.99,4577.06 3730,4564.59 3740,4564.59 3744.01,4577.06
  region net RXD: 4899.01,4682.94 4895,4695.41 4885,4695.41 4880.99,4682.94
  region net TXD: 4949.01,4722.94 4945,4735.41 4935,4735.41 4930.99,4722.94
  region net $1N6548: 5015.99,4242.06 5020,4229.59 5030,4229.59 5034.01,4242.06
  region net $1N6548: 4999.01,4712.94 4995,4725.41 4985,4725.41 4980.99,4712.94
  region net P2.0: 4577.06,4944.01 4564.59,4940 4564.59,4930 4577.06,4925.99
  region net P2.0: 5077.94,5790.99 5090.41,5795 5090.41,5805 5077.94,5809.01
  region net P2.1: 4557.06,4974.01 4544.59,4970 4544.59,4960 4557.06,4955.99
  region net P2.1: 5077.94,6020.99 5090.41,6025 5090.41,6035 5077.94,6039.01
  region net P2.2: 4537.06,5009.01 4524.59,5005 4524.59,4995 4537.06,4990.99
  region net P2.2: 5079.42,6227.55 5091.26,6232.14 5089.45,6242.14 5076.21,6245.28
  region net P2.3: 4517.06,5039.01 4504.59,5035 4504.59,5025 4517.06,5020.99
  region net P2.3: 5080.13,6447.71 5092.23,6452.07 5091.25,6462.07 5078.36,6465.64
  region net P2.4: 4492.06,5074.01 4479.59,5070 4479.59,5060 4492.06,5055.99
  region net P2.4: 5077.94,6660.99 5090.41,6665 5090.41,6675 5077.94,6679.01
  region net XTAL1: 4533.02,4895.75 4527.03,4884.1 4534.1,4877.03 4545.75,4883.02
  region net XTAL1: 4450.31,5230.98 4462.78,5234.98 4462.78,5244.98 4450.31,5248.99
Bottom Layer:
  region net TXD: 4423.35,3932.75 4415,3982.32 4405,3989.77 4383.11,3962.75
  region net RXD: 4287.9,3896.6 4326.69,3886.24 4333.76,3893.31 4323.4,3932.1
  region net USB_VCC: 4788.02,3955.75 4782.03,3944.1 4789.1,3937.03 4800.75,3943.02
  region net USB_VCC: 3667.94,3835.99 3680.41,3840 3680.41,3850 3667.94,3854.01
  region net $1N5648: 4206.72,4269.01 4194.25,4265 4194.25,4255 4206.72,4250.99
  region net $1N5648: 4012.94,4250.99 4025.41,4255 4025.41,4265 4012.94,4269.01
  region net RXD: 4177.75,4573.02 4189.4,4567.03 4196.47,4574.1 4190.48,4585.75
  region net RXD: 4299.01,4042.94 4295,4055.41 4285,4055.41 4280.99,4042.94
  region net TXD: 4240.75,4573.02 4252.4,4567.03 4259.47,4574.1 4253.48,4585.75
  region net TXD: 4399.01,4022.94 4395,4035.41 4385,4035.41 4380.99,4022.94
  region net RST: 4139.07,4594.01 4126.6,4590 4126.6,4580 4139.07,4575.99
  region net RST: 3742.94,4575.99 3755.41,4580 3755.41,4590 3742.94,4594.01
  region net RXD: 4878.02,4675.75 4872.03,4664.1 4879.1,4657.03 4890.75,4663.02
  region net TXD: 4932.06,4724.01 4919.59,4720 4919.59,4710 4932.06,4705.99
  region net $1N6548: 5034.01,4257.94 5030,4270.41 5020,4270.41 5015.99,4257.94
  region net $1N6548: 4989.25,4693.02 5000.9,4687.03 5007.97,4694.1 5001.98,4705.75
  region net P2.0: 4596.98,4934.25 4602.97,4945.9 4595.9,4952.97 4584.25,4946.98
  region net P2.0: 5060.99,5792.06 5065,5779.59 5075,5779.59 5079.01,5792.06
  region net P2.1: 4576.98,4964.25 4582.97,4975.9 4575.9,4982.97 4564.25,4976.98
  region net P2.1: 5058.02,6030.75 5052.03,6019.1 5059.1,6012.03 5070.75,6018.02
  region net P2.2: 4556.98,4999.25 4562.97,5010.9 4555.9,5017.97 4544.25,5011.98
  region net P2.2: 5058.02,6235.75 5052.03,6224.1 5059.1,6217.03 5070.75,6223.02
  region net P2.3: 4536.98,5029.25 4542.97,5040.9 4535.9,5047.97 4524.25,5041.98
  region net P2.3: 5059.38,6456.96 5053.24,6445.31 5060.13,6438.06 5071.78,6443.89
  region net P2.4: 4511.98,5064.25 4517.97,5075.9 4510.9,5082.97 4499.25,5076.98
  region net P2.4: 5058.02,6670.75 5052.03,6659.1 5059.1,6652.03 5070.75,6658.02
  region net XTAL1: 4545.75,4906.98 4534.1,4912.97 4527.03,4905.9 4533.02,4894.25
  region net XTAL1: 4431.97,5233.97 4435,5220.64 4445,5218.63 4449.63,5230.42

## Text inside footprints (layer, text, board x,y; h text height)
OLED1: Top Silkscreen Layer "IIC-Connector" at 3992.32,6243.16 h30.66; Top Silkscreen Layer "0.96'OLED" at 4066.9,6331.65 h30.66